# EAGLE board Shiny Bruticus-Jofo (EAGLE 7.6.0)

Size 73.58 x 164.99 mm. Coordinates in mm from the lower left corner, seen from the top.
Outline: 0,0 56.82,0 56.82,53.33 0,53.33 0,0
Copper layers (1*16): Top 0.035mm / dielectric 1.5mm / Bottom 0.035mm
Design rules "default": minimum track width 10mil, minimum drill 24mil, track to track 8mil, track to pad 8mil, pad to pad 8mil, via to via 8mil, smd to smd 8mil, copper to edge 40mil, drill to drill 8mil, minimum pad ring 10mil, minimum via ring 8mil, stop-mask expansion 4mil, vias tented up to drill 0mil, thermal gap 10mil

## Footprints (pad centres in the part's own frame; a part is rotated, then mirrored left to right if it is on the bottom)
HDSP-M = drill 0.813 long: 1 -5.08,-7.62; 2 -2.54,-7.62; 3 0,-7.62; 4 2.54,-7.62; 5 5.08,-7.62; 6 5.08,7.62; 7 2.54,7.62; 8 0,7.62; 9 -2.54,7.62; 10 -5.08,7.62
0207/10 = drill 0.813 octagon: 1 -5.08,0; 2 5.08,0
DIL16 = drill 0.813 long: 1 -8.89,-3.81; 2 -6.35,-3.81; 3 -3.81,-3.81; 4 -1.27,-3.81; 5 1.27,-3.81; 6 3.81,-3.81; 7 6.35,-3.81; 8 8.89,-3.81; 9 8.89,3.81; 10 6.35,3.81; 11 3.81,3.81; 12 1.27,3.81; 13 -1.27,3.81; 14 -3.81,3.81; 15 -6.35,3.81; 16 -8.89,3.81
ARDUINO_UNO = drill 1.016 pad 1.88: 0 63.5,50.8; 1 60.96,50.8; 2 58.42,50.8; 3 55.88,50.8; 3.3V 35.56,2.54; 4 53.34,50.8; 5 50.8,50.8; 5V 38.1,2.54; 6 48.26,50.8; 7 45.72,50.8; 8 41.656,50.8; 9 39.116,50.8; 10 36.576,50.8; 11 34.036,50.8; 12 31.496,50.8; 13 28.956,50.8; A0 50.8,2.54; A1 53.34,2.54; A2 55.88,2.54; A3 58.42,2.54; A4 60.96,2.54; A5 63.5,2.54; AREF 23.876,50.8; GND 26.416,50.8; GND. 43.18,2.54; GND.. 40.64,2.54; I/OREF 30.48,2.54; N/C 27.94,2.54; RESET 33.02,2.54; SCL 18.796,50.8; SDA 21.336,50.8; VIN 45.72,2.54 | hole 3.2: 66.04,7.62; 66.04,35.56; 15.24,50.8; 13.97,2.54

## Placement (x,y rotation side)
Digit17  [HDSP-M]  5,10.08 0 top
Digit18  [HDSP-M]  5,22.78 0 top
Digit19  [HDSP-M]  5,35.48 0 top
Digit20  [HDSP-M]  5,48.18 0 top
R1  100‎Ω  [0207/10]  5,124.38 0 top
U7  [DIL16]  5,60.88 0 top
U8  [DIL16]  5,73.58 0 top
U9  [DIL16]  5,86.28 0 top
U10  [DIL16]  5,98.98 0 top
U11  [ARDUINO_UNO]  5,111.68 0 top

## Library data of the parts
Digit17-Digit20 R1 U7-U11 = AUTODESK_CIRCUITS_BREADBOARD

## Nets
N$1: U7.7 U8.7 U9.7 U10.7 U11.2
N$2: U7.6 U8.6 U9.6 U10.6 U11.5
N$3: Digit17.1 U7.9
N$4: Digit17.2 U7.10
N$5: Digit17.4 U7.11
N$6: Digit17.6 U7.12
N$7: Digit17.7 U7.13
N$8: Digit17.10 U7.14
N$9: U7.1 U8.1 U9.1 U10.1 U11.3
N$10: U7.2 U8.2 U9.2 U10.2 U11.4
N$11: U7.5 U11.13
N$12: Digit17.9 U7.15
N$13: Digit18.1 U8.9
N$14: Digit18.2 U8.10
N$15: Digit18.4 U8.11
N$16: Digit18.6 U8.12
N$17: Digit18.7 U8.13
N$18: Digit18.10 U8.14
N$19: U8.5 U11.12
N$20: Digit18.9 U8.15
N$21: Digit19.1 U9.9
N$22: Digit19.2 U9.10
N$23: Digit19.4 U9.11
N$24: Digit19.6 U9.12
N$25: Digit19.7 U9.13
N$26: Digit19.10 U9.14
N$27: U9.5 U11.11
N$28: Digit19.9 U9.15
N$29: U7.8 U8.8 U9.8 U10.8 U11.GND
N$30: Digit20.1 U10.9
N$31: Digit20.2 U10.10
N$32: Digit20.4 U10.11
N$33: Digit20.6 U10.12
N$34: Digit20.7 U10.13
N$35: Digit20.10 U10.14
N$36: U10.5 U11.10
N$37: Digit20.9 U10.15
N$38: Digit17.3 Digit18.3 Digit19.3 Digit20.3 R1.2
N$39: R1.1 U11.GND.
N$40: U7.3 U7.4 U7.16 U8.3 U8.4 U8.16 U9.3 U9.4 U9.16 U10.3 U10.4 U10.16 U11.5V

## Tracks (layer width: path | path; a pad name or v marks a point on that pad's centre or on a via)
N$1  (4 unrouted)
N$2  (4 unrouted)
N$3  (1 unrouted)
N$4  (1 unrouted)
N$5  (1 unrouted)
N$6  (1 unrouted)
N$7  (1 unrouted)
N$8  (1 unrouted)
N$9  (4 unrouted)
N$10  (4 unrouted)
N$11  (1 unrouted)
N$12  (1 unrouted)
N$13  (1 unrouted)
N$14  (1 unrouted)
N$15  (1 unrouted)
N$16  (1 unrouted)
N$17  (1 unrouted)
N$18  (1 unrouted)
N$19  (1 unrouted)
N$20  (1 unrouted)
N$21  (1 unrouted)
N$22  (1 unrouted)
N$23  (1 unrouted)
N$24  (1 unrouted)
N$25  (1 unrouted)
N$26  (1 unrouted)
N$27  (1 unrouted)
N$28  (1 unrouted)
N$29  (4 unrouted)
N$30  (1 unrouted)
N$31  (1 unrouted)
N$32  (1 unrouted)
N$33  (1 unrouted)
N$34  (1 unrouted)
N$35  (1 unrouted)
N$36  (1 unrouted)
N$37  (1 unrouted)
N$38  (4 unrouted)
N$39  (1 unrouted)
N$40  (12 unrouted)